# EAGLE board front (EAGLE 6.2)
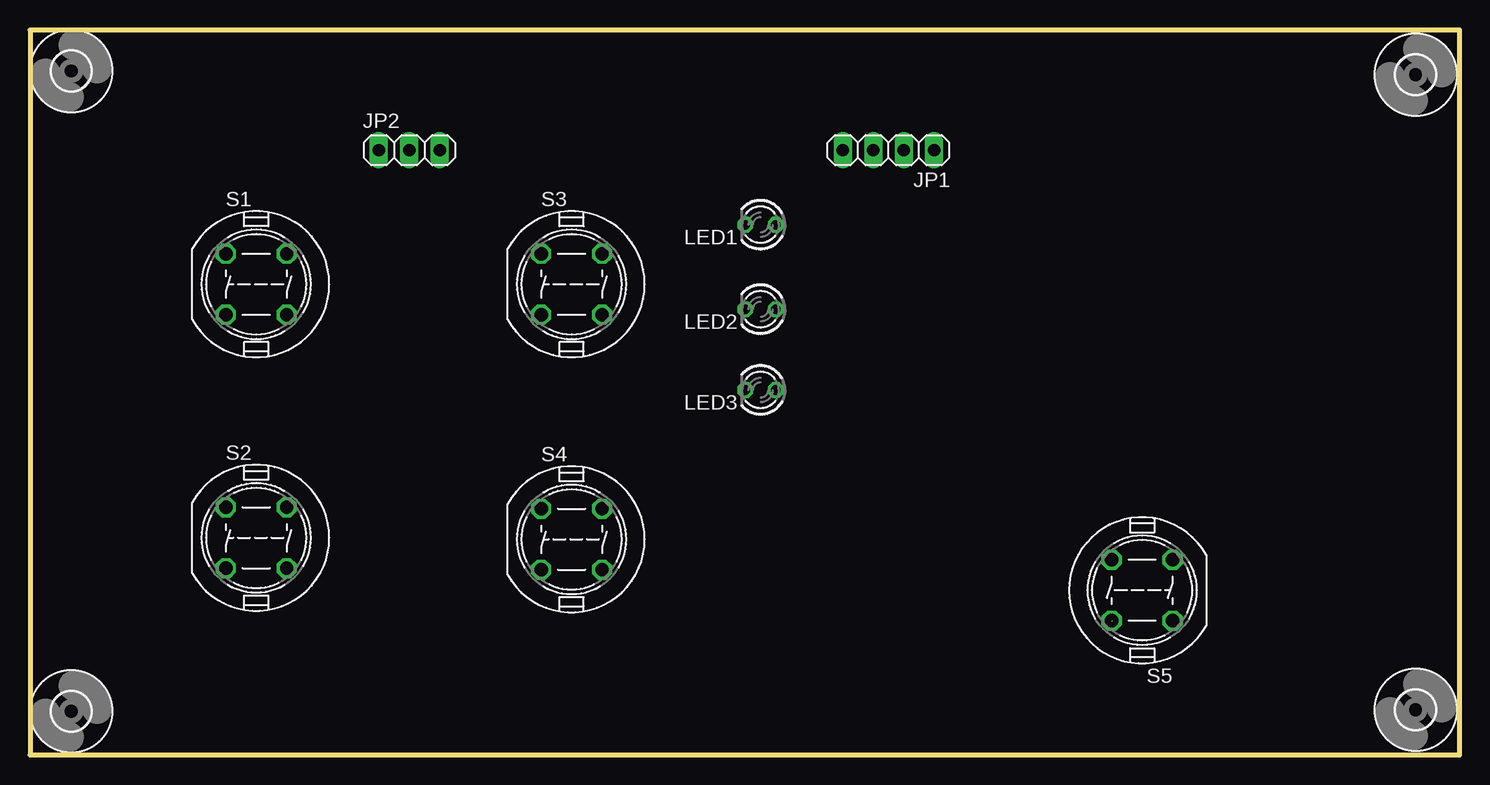
[diagram p0: board, top side]
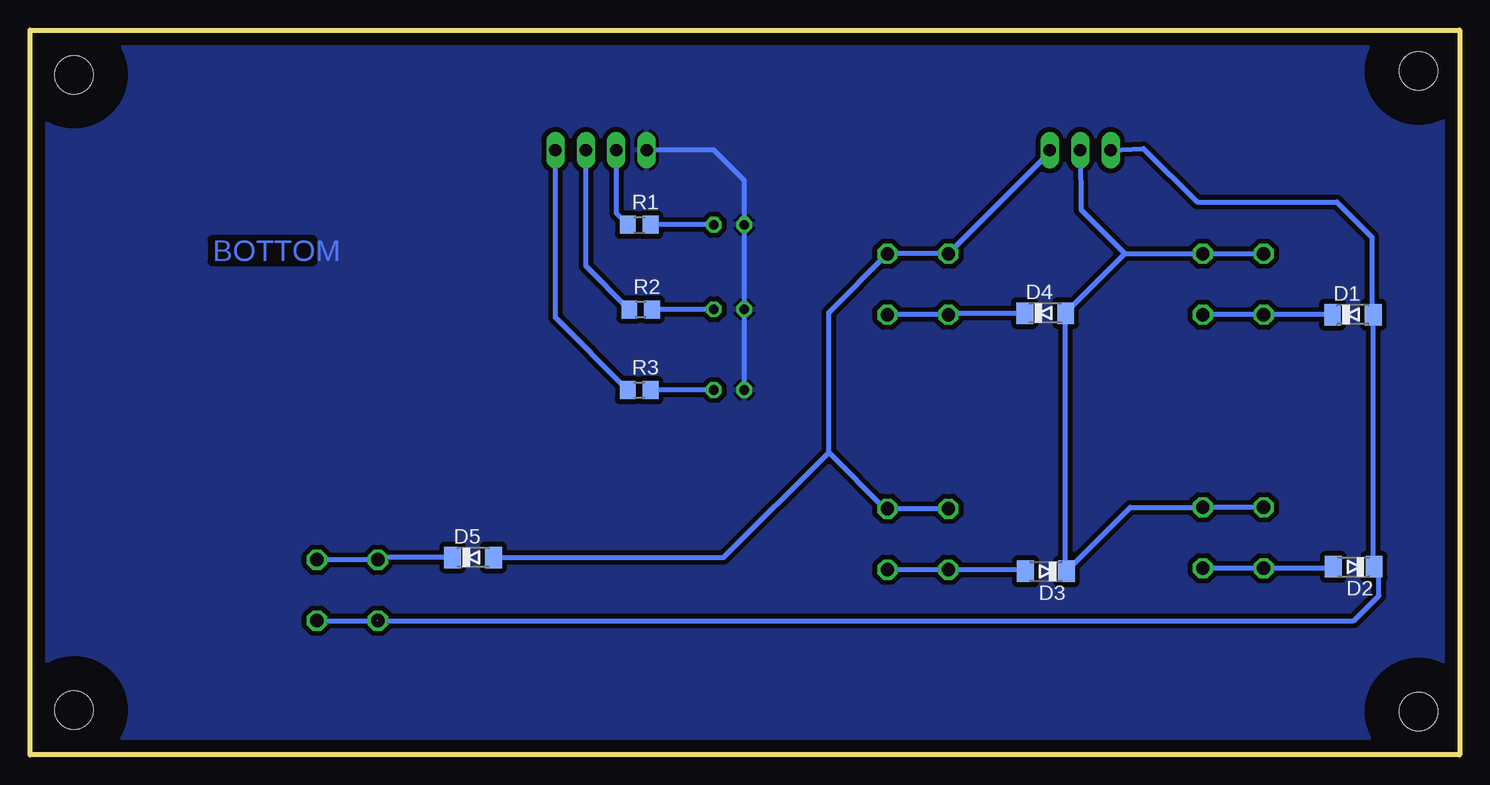
[diagram p1: board, bottom side, seen from below]

Size 119.17 x 60.44 mm. Coordinates in mm from the lower left corner, seen from the top.
Outline: 0,0 119.17,0 119.17,60.44 0,60.44 0,0
Copper layers (1*16): Top 0.035mm / dielectric 1.5mm / Bottom 0.035mm
Design rules: minimum track width 10mil, minimum drill 24mil, track to track 8mil, track to pad 8mil, pad to pad 8mil, via to via 8mil, smd to smd 8mil, copper to edge 40mil, drill to drill 8mil, minimum pad ring 10mil, minimum via ring 8mil, stop-mask expansion 4mil, vias tented up to drill 0mil, thermal gap 10mil

## Footprints (pad centres in the part's own frame; a part is rotated, then mirrored left to right if it is on the bottom)
MINIMELF = smd 1.4 x 1.8: A 1.7,0; C -1.7,0
3,2 = hole 3.2: 0,0
1X04 = drill 1.016 long: 1 -3.81,0; 2 -1.27,0; 3 1.27,0; 4 3.81,0
1X03 = drill 1.016 long: 1 -2.54,0; 2 0,0; 3 2.54,0
LED3MM = drill 0.813 octagon: A -1.27,0; K 1.27,0
R0805 = smd 1.3 x 1.5: 1 -0.95,0; 2 0.95,0
DT6 = drill 1.118 octagon: 1 -2.54,2.54; 2 2.54,2.54; 3 2.54,-2.54; 4 -2.54,-2.54

## Placement (x,y rotation side)
D1  [MINIMELF]  8.89,36.7 0 bottom
D2  [MINIMELF]  8.83,15.68 180 bottom
D3  [MINIMELF]  34.48,15.3 180 bottom
D4  [MINIMELF]  34.54,36.83 0 bottom
D5  [MINIMELF]  82.23,16.45 0 bottom
H1  MOUNT-HOLE3.2  [3,2]  3.43,57.02 0 top
H2  MOUNT-HOLE3.2  [3,2]  3.43,3.62 0 top
H3  MOUNT-HOLE3.2  [3,2]  115.51,3.75 0 top
H4  MOUNT-HOLE3.2  [3,2]  115.51,56.71 0 top
JP1  [1X04]  71.56,50.42 180 top
JP2  [1X03]  31.62,50.42 0 top
LED1  [LED3MM]  60.9,44.2 180 top
LED2  [LED3MM]  60.9,37.15 180 top
LED3  [LED3MM]  60.9,30.42 180 top
R1  [R0805]  68.39,44.2 0 bottom
R2  [R0805]  68.26,37.15 0 bottom
R3  [R0805]  68.39,30.42 0 bottom
S1  DT6  [DT6]  18.86,39.24 0 top
S2  DT6  [DT6]  18.86,18.1 0 top
S3  DT6  [DT6]  45.15,39.24 0 top
S4  DT6  [DT6]  45.15,17.97 0 top
S5  DT6  [DT6]  92.71,13.72 180 top

## Library data of the parts
D1-D5 = diode
H1-H4 = holes
JP1 JP2 = pinhead
LED1-LED3 = led
R1-R3 = rcl
S1-S5 = switch-misc

## Nets
GND: JP1.4 LED1.K LED2.K LED3.K
N$1: LED1.A R1.2
N$2: LED2.A R2.2
N$3: LED3.A R3.2
N$4: JP1.3 R1.1
N$5: JP1.2 R2.1
N$6: JP1.1 R3.1
N$8: D1.C S1.3 S1.4
N$9: D2.A S2.3 S2.4
N$10: D4.C S3.3 S3.4
N$11: D3.A S4.3 S4.4
N$14: D3.C D4.A JP2.2 S1.1 S1.2 S2.1 S2.2
N$15: D5.A JP2.3 S3.1 S3.2 S4.1 S4.2
N$17: D1.A D2.C JP2.1 S5.1 S5.2
N$18: D5.C S5.3 S5.4

## Tracks (layer width: path | path; a pad name or v marks a point on that pad's centre or on a via)
GND
  Bottom 0.406: LED3.K LED2.K LED1.K 59.63,47.88 62.17,50.42 JP1.4
  pour Bottom (isolate 0.406): -30.29,78.3 137.48,78.3 137.48,-12.57 -30.29,-12.57
N$1
  Bottom 0.406: LED1.A R1.2
N$2
  Bottom 0.406: LED2.A R2.2
N$3
  Bottom 0.406: LED3.A R3.2
N$4
  Bottom 0.406: R1.1 70.29,45.15 JP1.3
N$5
  Bottom 0.406: R2.1 72.83,40.77 JP1.2
N$6
  Bottom 0.406: R3.1 75.37,36.45 JP1.1
N$8
  Bottom 0.406: D1.C S1.4 S1.3
N$9
  Bottom 0.406: D2.A 10.65,15.56 S2.4 S2.3
N$10
  Bottom 0.406: D4.C 42.48,36.83 S3.4 S3.3
N$11
  Bottom 0.406: S4.3 S4.4 36.31,15.43 D3.A
N$14
  Bottom 0.406: S2.1 S2.2 27.45,20.64 D3.C 32.84,15.37 D4.A 27.89,41.78 | 27.89,41.78 S1.2 S1.1 | JP2.2 31.56,45.45 27.89,41.78
N$15
  Bottom 0.406: S4.1 S4.2 47.88,20.51 52.58,25.21 | JP2.3 34.1,50.29 S3.1 S3.2 52.58,36.89 52.58,25.21 | D5.A 61.34,16.45 52.58,25.21
N$17  (1 unrouted)
  Bottom 0.406: JP2.1 26.35,50.55 21.84,46.1 10.22,46.1 7.3,43.18 7.3,36.82 D1.A 7.19,15.75 D2.C 6.73,15.29 6.73,13.27 8.83,11.18 S5.2 | S5.1 90.23,11.18 89.85,11.56
N$18
  Bottom 0.406: D5.C 89.98,16.45 S5.3 S5.4

## Text on the board
Bottom: BOTTOM